# EAGLE board Utility_Micro_v196 (EAGLE 9.7.0)
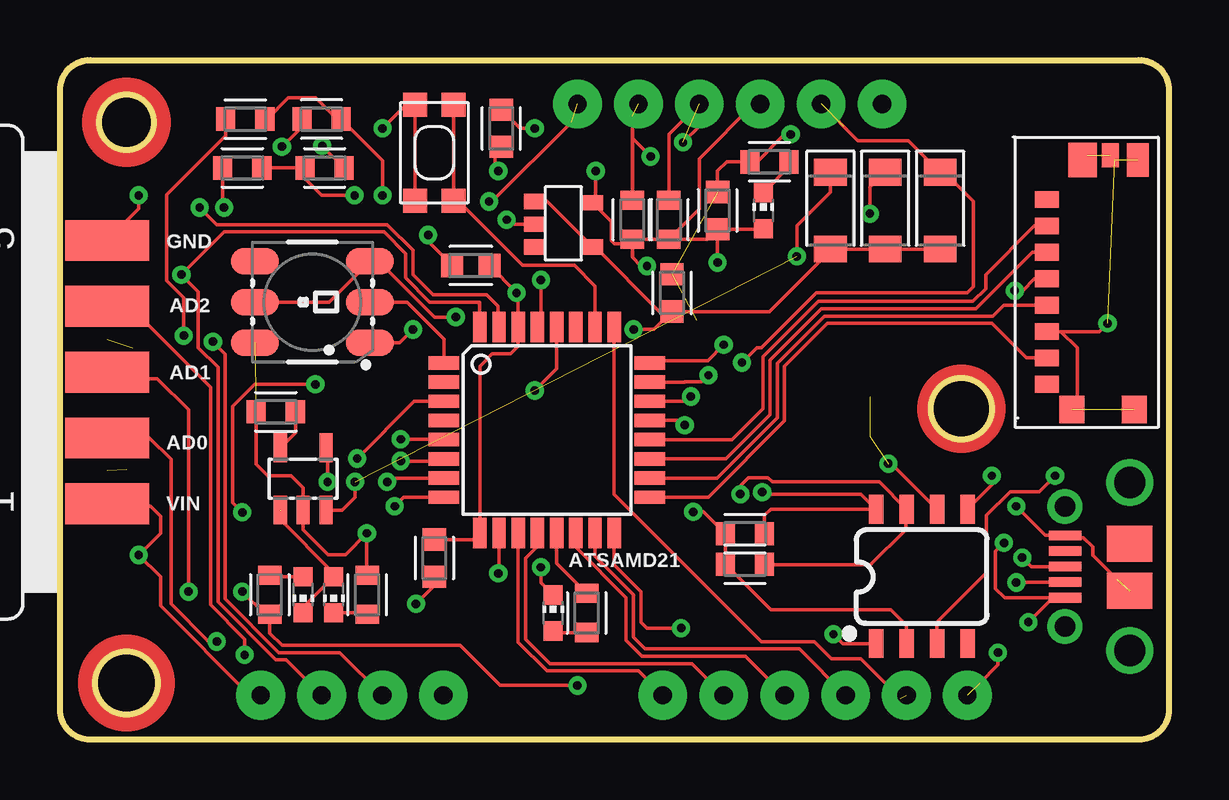
[diagram p0: board, top side]
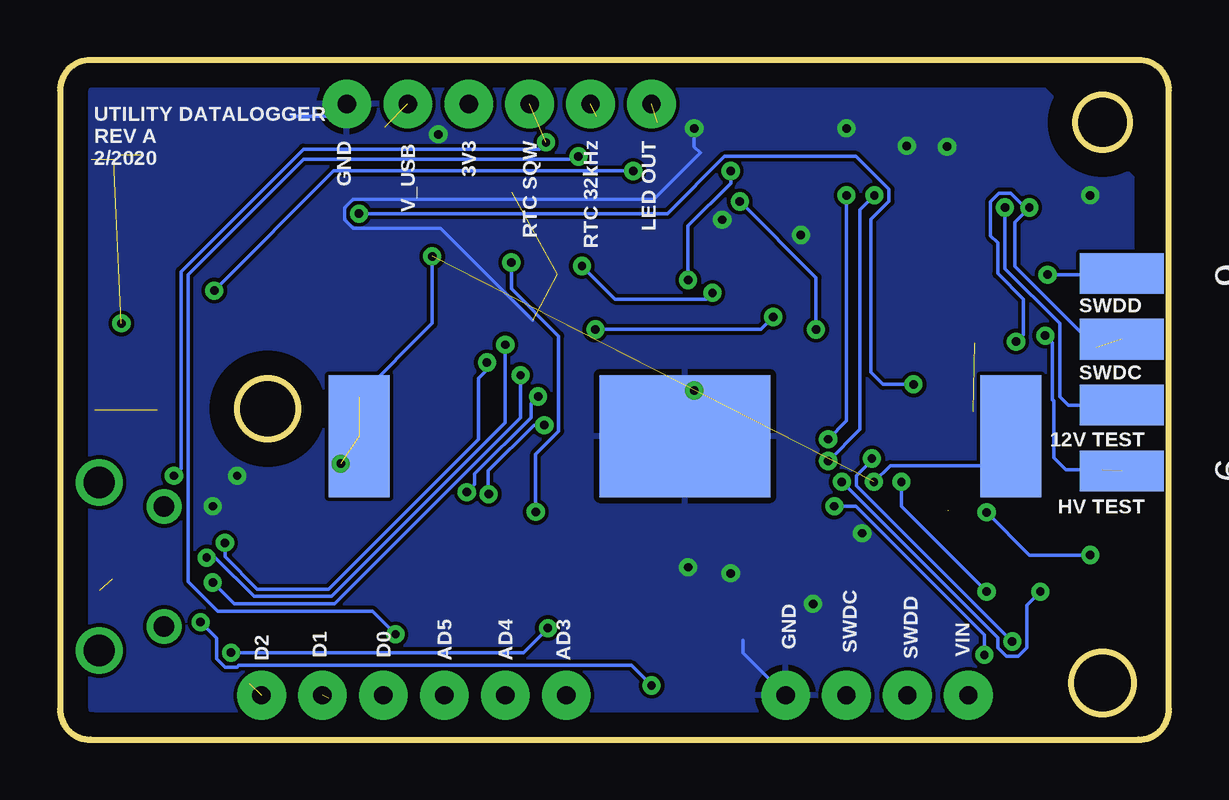
[diagram p1: board, bottom side, seen from below]

Size 46.23 x 28.32 mm. Coordinates in mm from the lower left corner, seen from the top.
Outline: 1.27,28.32 44.96,28.32 arc-90 46.23,27.05 46.23,1.27 arc-90 44.96,0 1.27,0 arc-90 0,1.27 0,27.05 arc-90 1.27,28.32
Outline: circle at 2.77,25.73 radius 1.14
Outline: circle at 2.77,2.36 radius 1.3
Outline: circle at 37.57,13.79 radius 1.27
Copper layers (1*16): Top 0.035mm / dielectric 1.5mm / Bottom 0.035mm
Design rules "default": minimum track width 6mil, minimum drill 0.35mm, track to track 6mil, track to pad 6mil, pad to pad 6mil, via to via 6mil, smd to smd 6mil, copper to edge 40mil, drill to drill 6mil, minimum pad ring 10mil, minimum via ring 8mil, stop-mask expansion 4mil, vias tented up to drill 0mil, thermal gap 10mil

## Footprints (pad centres in the part's own frame; a part is rotated, then mirrored left to right if it is on the bottom)
TQFP32-08 = smd 1.27 x 0.559: 1 -4.293,2.8; 2 -4.293,2; 3 -4.293,1.2; 4 -4.293,0.4; 5 -4.293,-0.4; 6 -4.293,-1.2; 7 -4.293,-2; 8 -4.293,-2.8; 17 4.293,-2.8; 18 4.293,-2; 19 4.293,-1.2; 20 4.293,-0.4; 21 4.293,0.4; 22 4.293,1.2; 23 4.293,2; 24 4.293,2.8 | smd 0.559 x 1.27: 9 -2.8,-4.293; 10 -2,-4.293; 11 -1.2,-4.293; 12 -0.4,-4.293; 13 0.4,-4.293; 14 1.2,-4.293; 15 2,-4.293; 16 2.8,-4.293; 25 2.8,4.293; 26 2,4.293; 27 1.2,4.293; 28 0.4,4.293; 29 -0.4,4.293; 30 -1.2,4.293; 31 -2,4.293; 32 -2.8,4.293
CAPC1608X85 = smd 0.921 x 0.97: 1 -0.775,0; 2 0.775,0
SODFL3718X115 = smd 1.115 x 1.361: 1 -1.6,0; 2 1.6,0
SOT23-5L = smd 0.55 x 1.2: 1 -0.95,-1.3; 2 0,-1.3; 3 0.95,-1.3; 4 0.95,1.3; 5 -0.95,1.3
CHIP-LED0603 = smd 0.8 x 0.8: A 0,-0.75; C 0,0.75
BC-2005 = smd 5.08 x 2.54: P$1 0,0; P$2 0,-27.178 | smd 5.08 x 7.112: P$3 0,-13.589
RESC1608X60 = smd 0.799 x 0.974: 1 -0.815,0; 2 0.815,0
SO08 = smd 0.6 x 1.2: 1 -1.905,-2.8; 2 -0.635,-2.8; 3 0.635,-2.8; 4 1.905,-2.8; 5 1.905,2.8; 6 0.635,2.8; 7 -0.635,2.8; 8 -1.905,2.8
KMR2 = smd 1 x 1: 1 2,0.8; 2 2,-0.8; 3 -2,0.8; 4 -2,-0.8
LED-TRICOLOR-5050-IC = smd 2 x 1.1: 1 -2.4,1.7; 2 -2.4,0; 3 -2.4,-1.7; 4 2.4,-1.7; 5 2.4,0; 6 2.4,1.7
MOLEX_MICRO_USB = smd 1.9 x 1.5: CASE_GND 2.7,0.3; GND3 2.7,2.25 | smd 1.35 x 0.4: DMIN 0,0.65; DPLUS 0,1.3; GND 0,2.6; ID 0,1.95; VBUS 0,0 | drill 0.85 pad 1.45: P$6 0,-1.2; P$7 0,3.8 | drill 1.3: P$8 2.7,-2.2; P$9 2.7,4.8
SOT-25 = smd 0.889 x 0.635: P$1 0,0; P$2 0,-0.95; P$3 0,-1.9; P$4 2.4,-1.9; P$5 2.4,-0.05
TP_SMALL_6 = drill 0.762 pad 2.032: P$1 0,0; P$2 0,2.54; P$3 0,5.08; P$4 0,7.62; P$5 0,10.16; P$6 0,12.7
MICRO_SD_SMALL = smd 1 x 0.7: CMD 0,5.5; CS 0,6.6; DAT0 0,1.1; DAT1 0,0; DAT2 0,7.7; SCLK 0,3.3; VDD 0,4.4; VSS 0,2.2 | smd 1.05 x 1.15: GND1 1.05,-1.05; GND2 3.65,-1.05 | smd 1.2 x 1.45: GND3 1.5,9.35 | smd 0.7 x 1: GND4 2.65,9.55 | smd 0.9 x 1.4: GND5 3.8,9.35
TP_SMALL_4 = drill 0.762 pad 2.032: P$1 0,0; P$2 0,2.54; P$3 0,5.08; P$4 0,7.62
F09D = smd 1.7 x 3.5: 1 -5.486,-6.045; 2 -2.743,-6.045; 3 0,-6.045; 4 2.743,-6.045; 5 5.486,-6.045 | smd 1.7 x 3.5 bottom: 6 -4.115,-6.045; 7 -1.372,-6.045; 8 1.372,-6.045; 9 4.115,-6.045

## Placement (x,y rotation side)
ATSAMD21  ATSAMD21TQFP  [TQFP32-08]  20.3,12.9 0 top
C1  100nF  [CAPC1608X85]  17.13,19.76 0 top
C2  100nF  [CAPC1608X85]  15.6,7.57 90 top
C5  C_CHIP-0603(1608-METRIC)  [CAPC1608X85]  27.41,22.05 90 top
C7  1uF  [CAPC1608X85]  18.4,25.47 270 top
C8  C_CHIP-0603(1608-METRIC)  [CAPC1608X85]  25.51,18.62 90 top
D1  SCHOTTKY_MBR0520LT1GDO-219-AB(SOD123F)  [SODFL3718X115]  34.4,22.05 270 top
D2  SCHOTTKY_MBR0520LT1GDO-219-AB(SOD123F)  [SODFL3718X115]  32.11,22.05 270 top
D3  SCHOTTKY_MBR0520LT1GDO-219-AB(SOD123F)  [SODFL3718X115]  36.68,22.05 270 top
IC1  MCP73831/OT  [SOT23-5L]  10.14,10.87 0 top
LED1  [CHIP-LED0603]  10.14,6.04 180 top
LED2  [CHIP-LED0603]  11.41,6.04 180 top
LED3  [CHIP-LED0603]  20.55,5.28 0 top
LED8  [CHIP-LED0603]  29.32,22.05 0 top
LIR_2450  LIR2450H  [BC-2005]  6.58,12.65 270 bottom
R1  470  [RESC1608X60]  7.6,23.82 180 top
R2  100  [RESC1608X60]  11.03,23.82 180 top
R3  2.2k  [RESC1608X60]  7.73,25.86 180 top
R4  100  [RESC1608X60]  10.9,25.86 0 top
R5  12k  [RESC1608X60]  9,13.66 180 top
R6  470  [RESC1608X60]  8.74,6.04 90 top
R7  470  [RESC1608X60]  12.81,6.04 270 top
R8  10k  [RESC1608X60]  28.56,8.58 180 top
R9  10k  [RESC1608X60]  28.56,7.31 180 top
R10  1k  [RESC1608X60]  29.57,24.08 0 top
R11  1k  [RESC1608X60]  21.95,5.28 90 top
R12  10k  [RESC1608X60]  23.86,21.66 270 top
R13  10k  [RESC1608X60]  25.38,21.66 270 top
RTC1  DS3231M  [SO08]  35.92,6.81 0 top
SW1  SPST_TACT-KMR2  [KMR2]  15.6,24.46 270 top
U1  WS2812  [LED-TRICOLOR-5050-IC]  10.52,18.24 180 top
U$2  MOLEX_MICRO_USB  [MOLEX_MICRO_USB]  41.89,5.92 0 top
U$3  AP2112  [SOT-25]  19.79,22.43 0 top
U$4  TP_SMALL_6_DEVICE  [TP_SMALL_6]  34.27,26.49 90 top
U$5  TP_SMALL_6_DEVICE  [TP_SMALL_6]  25.13,1.85 270 top
U$6  SMALL_MICRO_SD  [MICRO_SD_SMALL]  41.13,14.81 0 top
U$10  TP_SMALL_4_DEVICE  [TP_SMALL_4]  15.98,1.85 90 top
X2  [F09D]  -4.08,15.31 90 top

## Library data of the parts
ATSAMD21 = ATSAMD21; CATEGORY: IC_Embedded; MANUFACTURER: Microchip; MPN: ATmega328P; OPERATING_TEMP: -40 to 85 °C; PART_STATUS: Active; SUB-CATEGORY: Microcontroller
C1 C2 C5 C7 C8 = Capacitor; CATEGORY: Capacitor
D1-D3 = Diode; CATEGORY: Diode; DESCRIPTION: DIODE SCHOTTKY 20V 500MA SOD123; MANUFACTURER: ON Semiconductor; MPN: MBR0520LT1G; SUB-CATEGORY: Schottky
IC1 LED1-LED3 LED8 SW1 = adafruit
LIR_2450 = CoinCellHolders
R1-R13 = Resistor; CATEGORY: Resistor; SUB-CATEGORY: Fixed
RTC1 = SparkFun-Clocks; PROD_ID: IC-11985
U1 = SparkFun-LED; PROD_ID: DIO-11598
U$2 = _microUSB.703a61e9-a720-4502-b905-a250d79a7013.flbr
U$3 = Voltage Regulator
U$4 U$5 U$10 = Test_Points
U$6 = _Memory_Cards.85c9cb0b-4d3c-4a06-937b-9a27f087b036.flbr
X2 = con-subd; OC_FARNELL: unknown; OC_NEWARK: unknown

## Nets
3V3: ATSAMD21.9 ATSAMD21.30 C1.2 C2.2 C5.1 LED8.A R8.2 R9.2 R12.2 R13.2 RTC1.2 U$3.P$5 U$4.P$3 U$6.VDD
48_V: R3.2 X2.6
DMIN: ATSAMD21.23 U$2.DMIN
DPLU: ATSAMD21.24 U$2.DPLUS
GND: ATSAMD21.10 ATSAMD21.28 C1.1 C2.1 C5.2 C7.1 C8.2 IC1.2 LED3.C LIR_2450.P$3 R2.1 R4.1 R5.2 R7.1 R10.1 RTC1.5 SW1.2 SW1.4 U1.6 U$2.CASE_GND U$2.GND U$3.P$2 U$4.P$1 U$10.P$1 X2.5
GPIO1: ATSAMD21.3 X2.2
GPIO2: ATSAMD21.7 X2.3
GPIO3: ATSAMD21.8 X2.4
GPIO4: ATSAMD21.11 U$5.P$1
GPIO5: ATSAMD21.12 U$5.P$2
GPIO6: ATSAMD21.14 U$5.P$3
GPIO7: ATSAMD21.15 U$5.P$4
GPIO8: ATSAMD21.25 U$5.P$5
GPIO9: ATSAMD21.16 U$5.P$6
MISO: ATSAMD21.17 U$6.DAT0
MOSI: ATSAMD21.19 U$6.CMD
N$1: LED3.A R11.1
N$2: U$6.GND1 U$6.GND2 U$6.GND3 U$6.GND4 U$6.GND5 U$6.VSS
N$5: ATSAMD21.13 R11.2
N$6: ATSAMD21.29 C7.2
N$11: R1.2 X2.7
N$13: IC1.5 R5.1
N$14: LED1.A R6.2
N$15: LED2.C R7.2
N$16: IC1.1 LED1.C LED2.A
N$17: LED8.C R10.2
N$27: RTC1.4
REG_VIN: C8.1 D1.2 D2.2 D3.2 U1.3 U1.5 U$3.P$1 U$3.P$4
RST: ATSAMD21.26 SW1.1 SW1.3
RTC_32KHZ: R12.1 RTC1.1 U$4.P$5
RTC_SCL: ATSAMD21.22 R8.1 RTC1.8
RTC_SDA: ATSAMD21.21 R9.1 RTC1.7
RTC_SQW: R13.1 RTC1.3 U$4.P$4
SCLK: ATSAMD21.18 U$6.SCLK
SEL: ATSAMD21.20 U$6.CS
SWDC: ATSAMD21.31 U$10.P$2 X2.8
SWDD: ATSAMD21.32 U$10.P$3 X2.9
UL1: ATSAMD21.1 U1.2
ULED_OUT: U1.1 U$4.P$6
V_12: ATSAMD21.6 R1.1 R2.2
V_48: ATSAMD21.5 R3.1 R4.2
VBAT: D2.1 IC1.3 LIR_2450.P$1 LIR_2450.P$2 RTC1.6
VBUS: D3.1 IC1.4 R6.1 U$2.VBUS U$4.P$2
VCC: D1.1 U$10.P$4 X2.1

## Tracks (layer width: path | path; a pad name or v marks a point on that pad's centre or on a via)
3V3  (via drill 0.35)
  Top 0.152: RTC1.2 35.29,4.77 34.64,5.42 29.64,5.42 R9.2 R8.2 26.83,9.49 v26.4,9.49 | 27.44,21.3 C5.1 | C5.1 29.29,21.27 LED8.A | R12.2 23.67,20.67 23.11,20.67 22.99,20.79 22.99,21.58 U$3.P$5 22.33,22.52 v22.33,23.7 | R13.2 26.99,20.85 C5.1 | R13.2 26.65,22.12 26.65,24.2 28.94,26.49 U$4.P$3 | R12.2 R13.2 | U$6.VDD 40.62,19.21 40.13,18.71 v39.8,18.71 | v27.41,19.89 C5.1 | R12.2 23.86,20.1 24.22,19.74 v24.47,19.74 | C1.2 v19.03,18.63 v19.03,18.62 19.1,18.55 ATSAMD21.30 19.1,16.4 18.78,16.08 18.01,16.08 17.5,15.56 ATSAMD21.9 17.23,8.34 C2.2
  Bottom 0.152: v39.8,18.71 34.81,23.7 v22.33,23.7 | v27.41,19.89 27.41,18.79 25.44,16.82 25.44,12.86 26.4,11.9 v26.4,9.49 | v24.47,19.74 23.09,18.36 19.28,18.36 v19.03,18.62
48_V  (via drill 0.35)  (1 unrouted)
  Top 0.152: R3.2 6.91,25.16 4.45,22.7 4.45,19.13 5.16,18.42 v5.16,16.84
  Bottom 0.152: v5.16,16.84 4.86,16.54 4.86,14.17 4.81,14.12 4.81,11.76 4.3,11.25 2.77,11.25
DMIN  (via drill 0.35)
  Top 0.152: U$2.DMIN 39.87,6.57 v39.86,6.55 | ATSAMD21.23 26.04,14.9 26.05,14.91 26.75,14.91 v27.03,15.19
  Bottom 0.152: v39.86,6.55 38.97,5.66 34.78,5.66 27.03,13.41 v27.03,15.19
DPLU  (via drill 0.35)
  Top 0.152: U$2.DPLUS 40.48,7.22 v40.11,7.59 | v27.67,16.46 27,15.79 24.69,15.79 ATSAMD21.24
  Bottom 0.152: v40.11,7.59 39.75,7.59 38.13,5.97 34.9,5.97 27.67,13.21 v27.67,16.46
GND  (via drill 0.35)  (4 unrouted)
  Top 0.152: R5.2 8.18,11.48 8.66,11 9.63,11 10.14,10.49 IC1.2 10.14,8.74 11.17,7.71 11.9,7.71 v12.79,8.6 12.79,6.88 R7.1 | C7.1 19.17,25.47 v19.79,25.47 | RTC1.5 38.84,10.62 v38.84,11 | v39.86,9.73 41.07,8.52 U$2.GND 41.98,8.42 42.66,8.42 43.05,8.03 43.05,7.68 44.05,6.68 | R4.1 10.09,25.55 v9.25,24.71 | R2.1 v10.93,24.74 | SW1.2 SW1.4 14.43,26.46 v13.44,25.47 | X2.5 3.28,22.12 v3.28,22.68 | LED3.C 20.05,6.54 v20.05,7.19 | ATSAMD21.10 18.3,6.96 v18.27,6.93 | C5.2 27.41,23.7 27.79,24.08 R10.1 29.06,24.08 30.21,25.22 v30.46,25.22 | ATSAMD21.28 20.7,15.46 v19.79,14.55 | U$3.P$2 18.81,21.48 v18.62,21.66 | C1.1 15.35,20.76 v15.35,21.03 | C2.1 15.6,6.42 v14.84,5.66
  Bottom 0.152: v19.79,25.47 19.79,24.71 19.54,24.46 21.47,22.53 34.01,22.53 34.37,22.17 34.37,21.67 34.01,21.31 30.36,21.31 26.52,17.47 | U$4.P$1 34.52,26.49 35.03,25.98 36.56,25.98 | U$10.P$1 17.76,3.63 17.76,4.14
  pour Bottom: 1.5,23.44 5.31,27.25 45.19,27.25 45.19,1.09 4.3,1.09 1.5,3.88
GPIO1  (via drill 0.35)
  Top 0.152: X2.2 3.74,12.57 4.63,11.68 4.63,5.66 6.2,4.09 v6.54,4.09 | v12.38,11.72 14.77,14.1 ATSAMD21.3
  Bottom 0.152: v12.38,11.72 12.38,11.64 13.03,10.99 13.03,10.59 v6.54,4.09
GPIO2  (via drill 0.35)
  Top 0.152: X2.3 2.23,15.05 4.06,15.05 5.36,13.74 v5.36,6.17 | v13.64,10.74 13.8,10.9 ATSAMD21.7
  Bottom 0.152: v13.64,10.74 7.14,4.25 7.14,3.84 6.79,3.48 6.29,3.48 5.93,3.84 5.93,5.6 v5.36,6.17
GPIO3  (via drill 0.35)
  Top 0.152: X2.4 2.23,17.79 3.17,17.79 6.28,14.68 6.28,5.61 7.7,4.2 v7.7,3.53 | v13.95,9.73 14.33,10.1 ATSAMD21.8
  Bottom 0.152: v7.7,3.53 7.7,4.37 13.06,9.73 v13.95,9.73
GPIO4
  Top 0.152: ATSAMD21.11 19.1,4.07 20.3,2.87 24.11,2.87 U$5.P$1
GPIO5
  Top 0.152: ATSAMD21.12 19.9,8.06 19.41,7.56 19.41,4.19 20.43,3.17 26.35,3.17 U$5.P$2
GPIO6
  Top 0.152: ATSAMD21.14 21.5,8.02 23.6,5.92 23.6,4.14 24.26,3.48 28.58,3.48 U$5.P$3
GPIO7
  Top 0.152: ATSAMD21.15 22.3,7.65 23.91,6.04 23.91,4.26 24.39,3.78 30.82,3.78 U$5.P$4
GPIO8  (1 unrouted)
  Top 0.152: 35.03,1.73 33.38,3.38 32.16,3.38 31.45,4.09 29.24,4.09 23.1,10.23 ATSAMD21.25
GPIO9  (via drill 0.35)  (1 unrouted)
  Top 0.152: ATSAMD21.16 23.1,7.28 24.21,6.17 24.21,4.9 24.47,4.65 v25.89,4.65 | v39.1,3.63 39.1,3.12 38.33,2.36
  Bottom 0.152: v25.89,4.65 26.9,3.63 v39.1,3.63
MISO
  Top 0.152: U$6.DAT0 40.28,15.91 38.84,17.35 31.98,17.35 30.21,15.57 30.21,13.28 27.03,10.1 ATSAMD21.17
MOSI
  Top 0.152: U$6.CMD 40.53,20.31 38.18,17.96 31.73,17.96 29.6,15.82 29.6,13.54 27.76,11.7 ATSAMD21.19
N$1
  Top 0.152: R11.1 20.62,4.47 LED3.A
N$2  (via drill 0.35)  (4 unrouted)
  Top 0.152: U$6.GND3 42.83,24.36 | 43.98,24.16 U$6.GND4 | U$6.GND1 42.4,13.76 42.4,16.33 41.72,17.01 U$6.VSS 43.33,17.01 v43.67,17.35
N$5
  Top 0.152: ATSAMD21.13 20.7,7.35 R11.2
N$6  (via drill 0.35)
  Top 0.152: C7.2 18.14,24.45 18.14,23.82 v18.27,23.7 | v20.05,19.15 20.05,17.34 ATSAMD21.29
  Bottom 0.152: v18.27,23.7 18.27,23.19 20.05,21.41 v20.05,19.15
N$11  (via drill 0.35)
  Top 0.152: 6.86,23.74 R1.2 6.79,22.23 v6.84,22.17
  Bottom 0.152: v6.84,22.17 6.84,19.63 4.55,17.35 4.55,14.3 4.2,13.94 X2.7
N$13
  Top 0.152: R5.1 9.81,12.79 IC1.5
N$14
  Top 0.152: LED1.A 8.81,6.79 R6.2
N$15
  Top 0.152: R7.2 12.59,5.29 LED2.C
N$16  (1 unrouted)
  Top 0.152: 9.12,9.6 9.19,9.54 9.19,9.16 11.37,6.97 11.41,6.97 LED2.A 10.14,5.52 LED1.C
N$17
  Top 0.152: LED8.C 30.39,23.86 R10.2
REG_VIN  (via drill 0.35)
  Top 0.152: C8.1 29.57,17.84 32.11,20.38 D2.2 34.14,20.45 34.27,20.57 D1.2 D3.2 | U$3.P$1 20.3,22.43 U$3.P$4 22.31,20.53 25,17.84 C8.1 | C8.1 24.76,17.09 v23.91,17.09 | v16.5,17.61 15.61,17.61 13.29,19.94 U1.3 11.22,18.24 U1.5
  Bottom 0.152: v23.91,17.09 17.02,17.09 v16.5,17.61
RST
  Top 0.152: ATSAMD21.26 22.3,18.9 21.44,19.76 19.28,19.76 16.59,22.46 SW1.1 SW1.3
RTC_32KHZ  (via drill 0.35)  (1 unrouted)
  Top 0.152: R12.1 23.86,25.07 | RTC1.1 32.63,4.01 v32.24,4.39 | v24.62,24.3 23.86,25.07 | 23.86,25.07 23.86,25.98
  Bottom 0.152: v32.24,4.39 33.2,5.36 39.65,5.36 40.87,6.58 40.87,19.38 36.08,24.18 24.75,24.18 v24.62,24.3
RTC_SCL  (via drill 0.35)
  Top 0.152: R8.1 29.37,9.35 29.63,9.61 RTC1.8 33.39,10.23 29.35,10.23 v29.27,10.31 | v26.3,14.3 26.1,14.1 ATSAMD21.22
  Bottom 0.152: v29.27,10.31 28.94,10.65 28.94,11 28.94,11.07 26.6,13.41 26.6,14 v26.3,14.3
RTC_SDA  (via drill 0.35)
  Top 0.152: R9.1 29.4,7.28 33.79,7.28 35.26,8.75 35.26,9.58 RTC1.7 34.15,10.74 29.7,10.74 29.52,10.92 28.7,10.92 28.36,10.58 v28.36,10.23 | v26.04,13.11 25.85,13.3 ATSAMD21.21
  Bottom 0.152: v28.36,10.23 28.38,10.25 28.38,11.2 26.47,13.11 v26.04,13.11
RTC_SQW  (via drill 0.35)  (1 unrouted)
  Top 0.152: R13.1 25.38,25.22 U$4.P$4 26.65,25.57 v25.97,24.89 | RTC1.3 36.56,4.89 38.62,6.95 38.62,9.34 39.61,10.33 40.82,10.33 v41.48,11
  Bottom 0.152: v41.48,11 41.18,11.3 41.18,19.5 36.08,24.61 26.25,24.61 v25.97,24.89
SCLK
  Top 0.152: U$6.SCLK 39.35,18.11 38.89,17.65 31.86,17.65 29.9,15.69 29.9,13.41 27.39,10.9 ATSAMD21.18
SEL
  Top 0.152: U$6.CS 40.62,21.41 38.59,19.38 38.59,18.79 38.06,18.26 31.61,18.26 29.29,15.95 29.29,13.79 28,12.5 ATSAMD21.20
SWDC  (via drill 0.35)  (1 unrouted)
  Top 0.152: ATSAMD21.31 18.26,17.23 18.26,18.05 17.77,18.54 15.55,18.54 14.71,19.38 14.71,20.38 13.63,21.46 6.53,21.46 v5.82,22.17 | U$10.P$2 11.66,3.63 9.12,3.63 6.89,5.87 6.89,16.07 v6.37,16.58
  Bottom 0.152: 3.03,16.33 6.43,19.73 6.43,21.57 v5.82,22.17 5.98,22.17 6.59,22.78 7.09,22.78 7.45,22.42 7.45,21 7.14,20.7 7.14,19.43 6.08,18.36 6.08,16.88 v6.37,16.58
SWDD  (via drill 0.35)
  Top 0.152: 17.5,17.61 ATSAMD21.32 17.49,17.21 17.49,18.24 15.42,18.24 14.4,19.25 14.4,20.26 13.51,21.16 6.84,21.16 v5.06,19.38 5.77,18.67 5.77,16.33 6.58,15.51 6.58,5.74 9,3.33 9.43,3.33 U$10.P$3
  Bottom 0.152: v5.06,19.38 2.01,19.38 X2.9
UL1
  Top 0.152: U1.2 14.46,18.24 16.01,16.69 ATSAMD21.1
ULED_OUT  (via drill 0.35)  (1 unrouted)
  Top 0.152: U1.1 14.16,16.54 v14.71,17.09 | v17.89,22.43 18.01,22.43 21.32,25.73
  Bottom 0.152: v17.89,22.43 14.71,19.25 v14.71,17.09
V_12  (via drill 0.35)
  Top 0.152: R1.1 R2.2 10.21,23.37 10.9,22.68 v12.28,22.68 | v14.2,11.61 15.92,11.61 ATSAMD21.6
  Bottom 0.152: v12.28,22.68 12.88,22.08 12.88,12.93 v14.2,11.61
V_48  (via drill 0.35)
  Top 0.152: R3.1 8.63,25.86 9.52,26.75 10.65,26.75 11.55,25.86 R4.2 13.44,24.13 v13.44,22.68 | v14.2,12.52 15.99,12.52 ATSAMD21.5
  Bottom 0.152: v13.44,22.68 13.44,13.28 v14.2,12.52
VBAT  (via drill 0.35)  (3 unrouted)
  Top 0.152: v12.3,10.74 12.3,10.11 11.76,9.57 IC1.3 | D2.1 32.11,22.81 30.71,21.41 v30.71,20.14 | RTC1.6 34.66,11.5 v34.52,11.5
  Bottom 0.152: LIR_2450.P$1 7.81,11.43 11.62,11.43 v12.3,10.74 | v30.71,20.14 30.71,17.35 33.76,14.3
VBUS  (via drill 0.35)  (2 unrouted)
  Top 0.152: IC1.4 11.16,12.1 v11.16,10.74 | v7.6,6.17 8.54,5.23 R6.1 8.74,4.44 9.25,3.94 16.68,3.94 18.35,2.26 v21.57,2.26 | v39.35,8.2 39,7.85 39,6.3 39.38,5.92 41.38,5.92 | U$2.VBUS 41.38,5.92 | v28.43,15.72 29.04,16.33 29.24,16.33 31.53,18.62 37.83,18.62 38.08,18.87 38.08,22.43 37.06,23.44 36.68,23.44 D3.1 35.36,24.97 33.25,24.97 U$4.P$2 | v40.37,4.9 41.38,5.92
  Bottom 0.152: v11.16,10.74 11.16,9.73 v7.6,6.17 | v39.35,8.2 39.35,7.62 38.01,6.27 35.03,6.27 28.78,12.52 28.78,15.06 28.43,15.41 v28.43,15.72 | v40.37,4.9 39.7,4.24 39.7,3.38 39.35,3.02 38.85,3.02 38.77,3.1 22.41,3.1 v21.57,2.26
VCC  (via drill 0.35)
  Top 0.152: X2.1 2.06,9.73 3.79,9.73 4.2,9.32 4.2,8.61 v3.28,7.69 4.2,6.78 4.2,5.57 7.92,1.85 U$10.P$4 | v7.6,9.47 7.19,9.88 7.19,13.88 8.12,14.81 v10.65,14.81 | v33.76,21.92 33.76,23.01 D1.1
  Bottom 0.152: v3.28,7.69 5.82,7.69 v7.6,9.47 | v10.65,14.81 11.92,14.81 12.43,15.31 12.43,21.68 11.67,22.43 11.67,22.93 13.04,24.3 18.52,24.3 20.9,21.92 v33.76,21.92
(copper drawn outside any net)
  shapes: Top circle x3

## Text on the board
tPlace: GND | AD2 | AD1 | AD0 | VIN | ATSAMD21
bPlace: LED OUT | RTC 32kHz | RTC SQW | 3V3 | V_USB | GND | UTILITY DATALOGGER / REV A / 2/2020 | SWDD | SWDC | 12V TEST | HV TEST | AD3 | AD4 | AD5 | VIN | D0 | D1 | D2 | SWDD | SWDC | GND | VIN